# EAGLE board quadcopter (EAGLE 7.5.0)
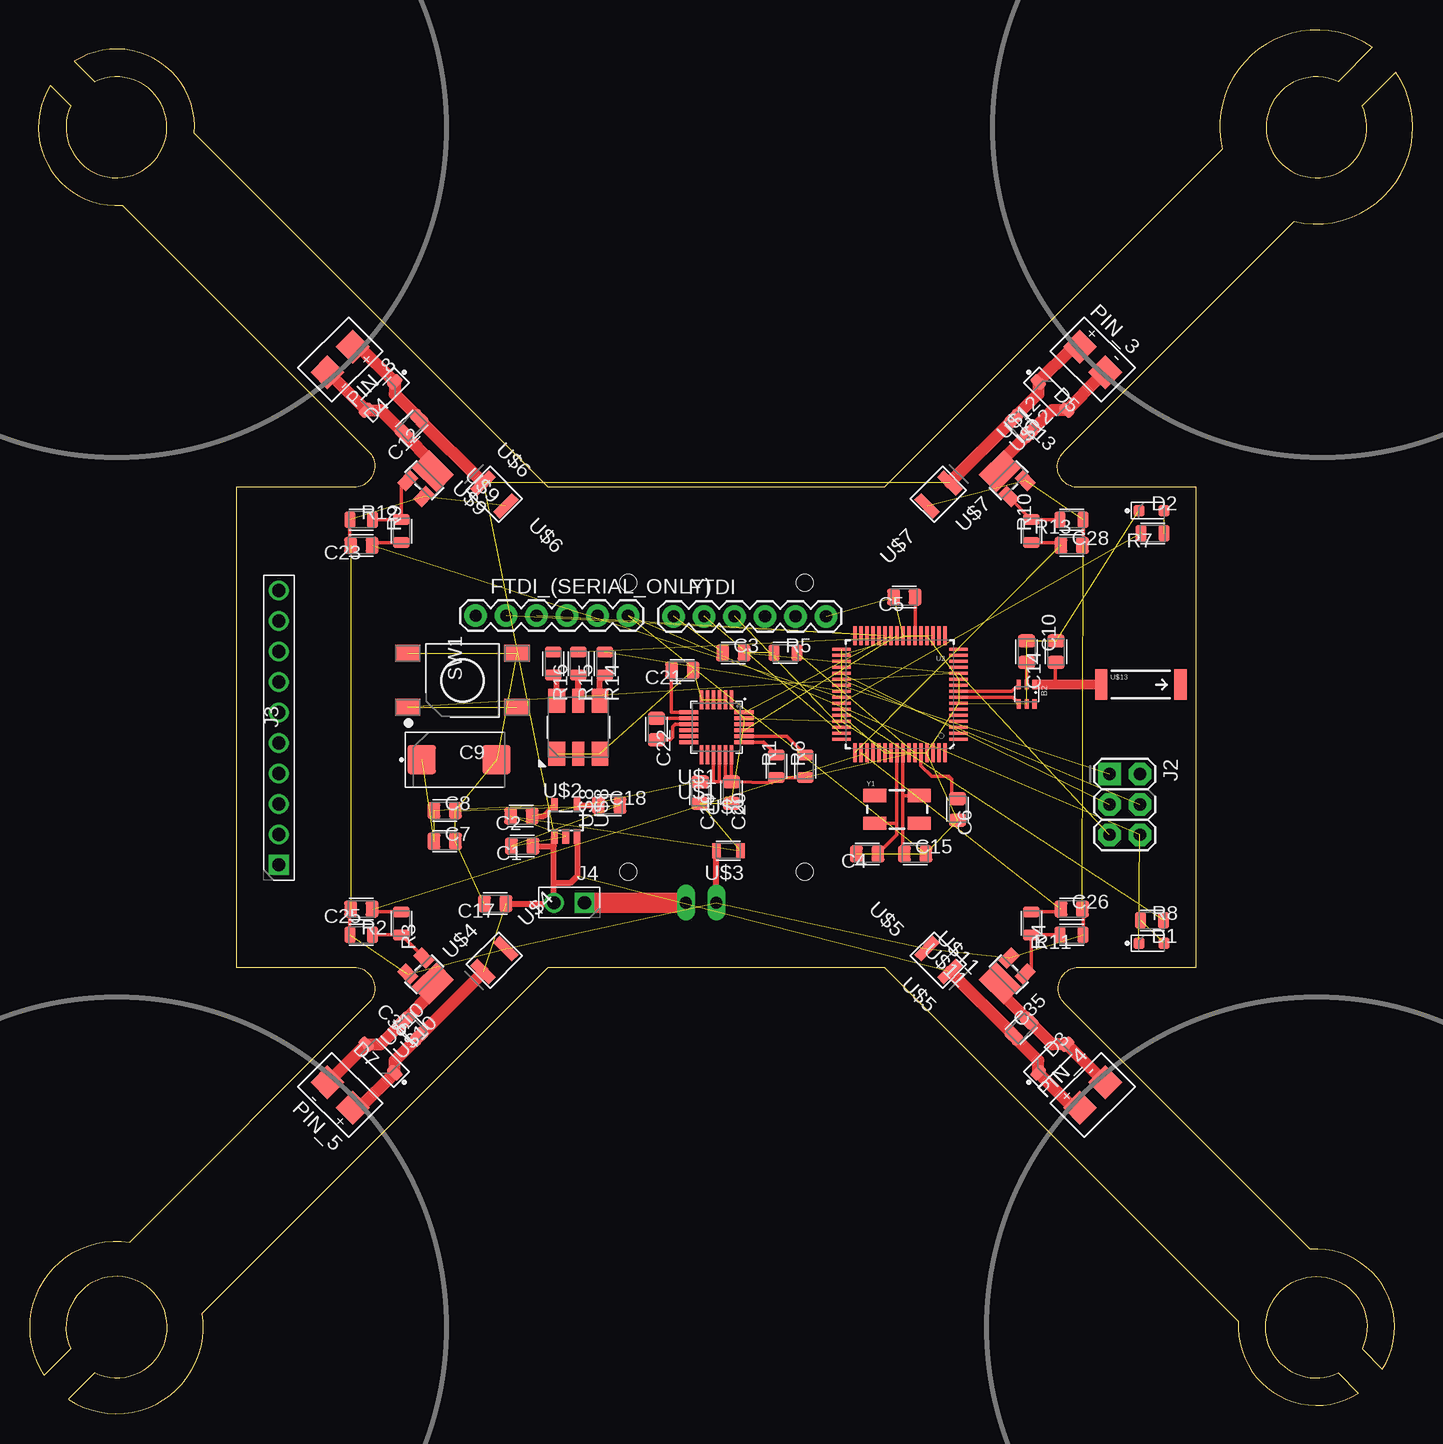
[diagram p0: board, top side]
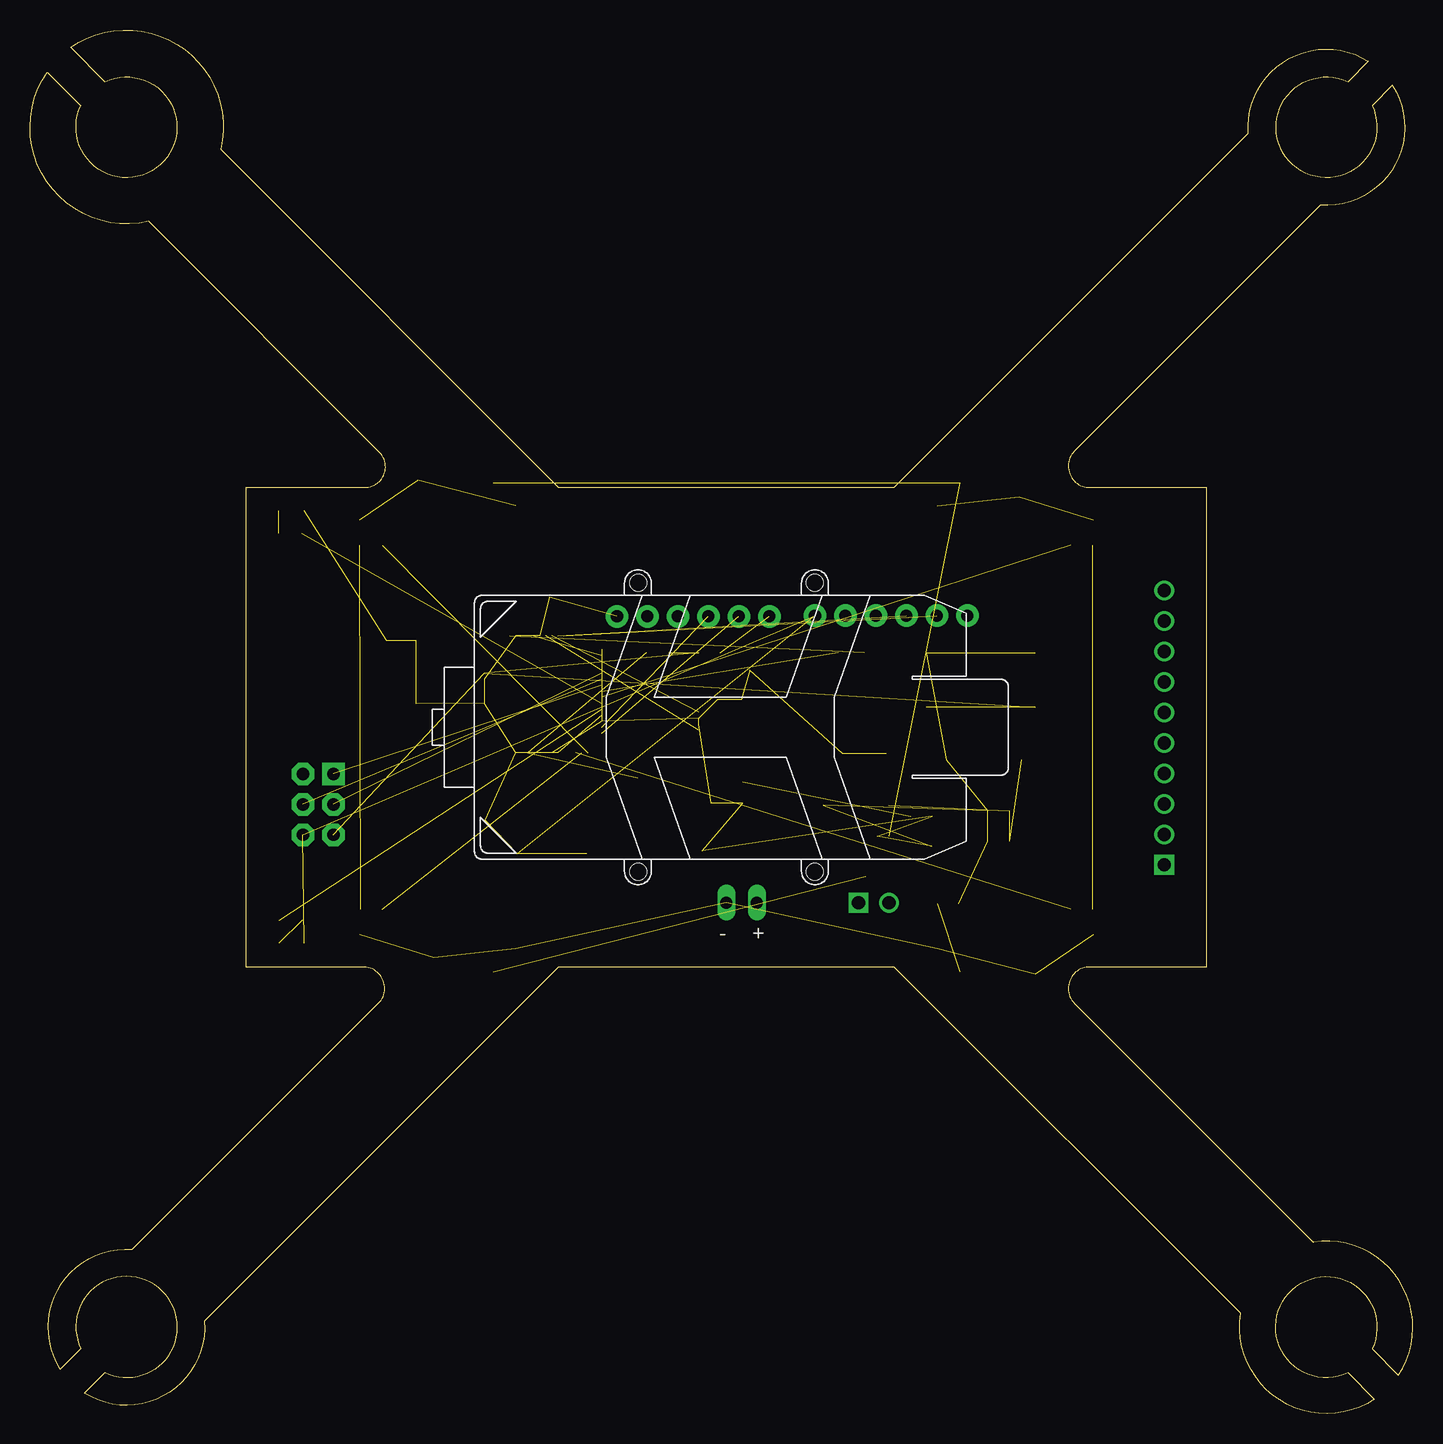
[diagram p1: board, bottom side, seen from below]

Size 115.24 x 115.31 mm. Coordinates in mm from the lower left corner, seen from the top.
Outline: 87.21,77.21 97.21,77.21 97.21,37.21 87.21,37.21 arc127 86.21,34.21 106.71,13.71 arc-127 112.71,3.71 111.01,5.41 arc70 110.21,10.21 arc180 104.21,4.21 arc70 109.01,3.41 110.71,1.71 arc-126 100.71,7.71 71.21,37.21 43.21,37.21 14.36,8.36 arc-132 3.21,1.21 5.41,3.41 arc321 3.41,5.41 1.21,3.21 arc-132 8.31,14.31 28.21,34.21 arc127 27.21,37.21 17.21,37.21 17.21,77.21 27.21,77.21 arc127 28.21,80.21 7.71,100.71 arc-127 1.71,110.71 3.41,109.01 arc321 5.41,111.01 3.71,112.71 arc-127 13.71,106.71 43.21,77.21 71.21,77.21 99.36,105.36 arc-138 111.86,113.86 109.01,111.01 arc321 111.01,109.01 113.81,111.81 arc-138 105.36,99.36 86.21,80.21
Outline: 87.21,77.21 arc-135 86.21,80.21
Outline: 87.21,77.21 arc-135 86.21,80.21
Copper layers (1*2*15*16): Top 0.035559375mm / dielectric 1.501140625mm / Route2 0.035559375mm / dielectric 0.149859375mm / Route15 0.035559375mm / dielectric 0.200659375mm / Bottom 0.035559375mm
Design rules "Xuefei-4pcb-33board": minimum track width 6mil, minimum drill 15mil, track to track 6mil, track to pad 6mil, pad to pad 6mil, via to via 6mil, smd to smd 6mil, copper to edge 10mil, drill to drill 10mil, minimum pad ring 10mil, minimum via ring 8mil, stop-mask expansion 4mil, vias tented up to drill 0mil, thermal gap 10mil
Net classes: 1 HighAmps: width 0.762 mm

## Footprints (pad centres in the part's own frame; a part is rotated, then mirrored left to right if it is on the bottom)
BALUN = smd 0.35 x 0.8: 1 -0.65,-0.8; 2 0,-0.8; 3 0.65,-0.8; 4 0.65,0.8; 5 0,0.8; 6 -0.65,0.8
BATTERY-W/HOLDER-380MAH-HUBSAN = drill 1 long: + -2.54,14.605; - 0,14.605 | hole 1.4: -7.35,-12.05; -7.35,12.05; 7.35,-12.05; 7.35,12.05
CAPC2012X140_HS = smd 1.08 x 1.42: 1 -0.895,0; 2 0.895,0
CAPMP7343X310_HS = smd 2.37 x 2.43: 1 -3.12,0; 2 3.12,0
LEDSC125X200X120-2_HS = smd 0.94 x 0.99: A 1.045,0; C -1.045,0
SOD3716X135_HS = smd 1.25 x 0.8: A 1.665,0; C -1.665,0
FTDI_BASIC = drill 1.016 pad 1.88: CTS 10.16,0; DTR 0,0; GND 12.7,0; RXI 2.54,0; TXO 5.08,0; VCC 7.62,0
2X3-NS = drill 1.016 pad 1.88 square: 1 -2.54,-1.27 | drill 1.016 pad 1.88 octagon: 2 -2.54,1.27; 3 0,-1.27; 4 0,1.27; 5 2.54,-1.27; 6 2.54,1.27
HDRV10W63P254_10X1_2540X254H838_HS = drill 1.1 pad 1.65 square: 1 0,0 | drill 1.1 pad 1.65: 2 2.54,0; 3 5.08,0; 4 7.62,0; 5 10.16,0; 6 12.7,0; 7 15.24,0; 8 17.78,0; 9 20.32,0; 10 22.86,0
MALE_HEADER_2X1_0.1IN = drill 1.1 pad 1.65 square: 1 0,0 | drill 1.1 pad 1.65: 2 2.54,0
MOTOR_PADS = smd 2 x 2: V+ -1,0; V- 2,0
RESC2012X60_HS = smd 0.92 x 1.38: 1 -0.955,0; 2 0.955,0
TE_FSM8JSMA_HS = smd 1.4 x 2.1: 1 -2.25,4.55; 2 -2.25,-4.55; 3 2.25,4.55; 4 2.25,-4.55
QFN-64 = smd 1.562 x 0.28: 1 -4.881,3.75; 2 -4.881,3.25; 3 -4.881,2.75; 4 -4.881,2.25; 5 -4.881,1.75; 6 -4.881,1.25; 7 -4.881,0.75; 8 -4.881,0.25; 9 -4.881,-0.25; 10 -4.881,-0.75; 11 -4.881,-1.25; 12 -4.881,-1.75; 13 -4.881,-2.25; 14 -4.881,-2.75; 15 -4.881,-3.25; 16 -4.881,-3.75; 33 4.881,-3.75; 34 4.881,-3.25; 35 4.881,-2.75; 36 4.881,-2.25; 37 4.881,-1.75; 38 4.881,-1.25; 39 4.881,-0.75; 40 4.881,-0.25; 41 4.881,0.25; 42 4.881,0.75; 43 4.881,1.25; 44 4.881,1.75; 45 4.881,2.25; 46 4.881,2.75; 47 4.881,3.25; 48 4.881,3.75 | smd 0.28 x 1.562: 17 -3.75,-4.881; 18 -3.25,-4.881; 19 -2.75,-4.881; 20 -2.25,-4.881; 21 -1.75,-4.881; 22 -1.25,-4.881; 23 -0.75,-4.881; 24 -0.25,-4.881; 25 0.25,-4.881; 26 0.75,-4.881; 27 1.25,-4.881; 28 1.75,-4.881; 29 2.25,-4.881; 30 2.75,-4.881; 31 3.25,-4.881; 32 3.75,-4.881; 49 3.75,4.881; 50 3.25,4.881; 51 2.75,4.881; 52 2.25,4.881; 53 1.75,4.881; 54 1.25,4.881; 55 0.75,4.881; 56 0.25,4.881; 57 -0.25,4.881; 58 -0.75,4.881; 59 -1.25,4.881; 60 -1.75,4.881; 61 -2.25,4.881; 62 -2.75,4.881; 63 -3.25,4.881; 64 -3.75,4.881
LGA-24_4X4MM = smd 0.3 x 1.6: P$1 1.25,2.3; P$2 0.75,2.3; P$3 0.25,2.3; P$4 -0.25,2.3; P$5 -0.75,2.3; P$6 -1.25,2.3; P$13 -1.25,-2.3; P$14 -0.75,-2.3; P$15 -0.25,-2.3; P$16 0.25,-2.3; P$17 0.75,-2.3; P$18 1.25,-2.3 | smd 1.6 x 0.3: P$7 -2.3,1.25; P$8 -2.3,0.75; P$9 -2.3,0.25; P$10 -2.3,-0.25; P$11 -2.3,-0.75; P$12 -2.3,-1.25; P$19 2.3,-1.25; P$20 2.3,-0.75; P$21 2.3,-0.25; P$22 2.3,0.25; P$23 2.3,0.75; P$24 2.3,1.25
SOT23-DBV = smd 0.55 x 1.2: 1 -0.95,-1.3; 2 0,-1.3; 3 0.95,-1.3; 4 0.95,1.3; 5 -0.95,1.3
SMD_RESISTOR = smd 0.7 x 1.25: P$1 -1,0; P$2 1,0
TAJB_SMB_POLAR_CAP = smd 0.8 x 2.2: P$1 -1.35,0; P$2 1.35,0
QBLP679E-RGB = smd 2 x 1.4: P$1 2.2,-1.8; P$3 2.2,1.8; P$4 -2.2,1.8; P$6 -2.2,-1.8 | smd 2 x 1: P$2 2.2,0; P$5 -2.2,0
LITTLE_FOOT_MOSFET_W/_HEAT_SPREADER = smd 1 x 1.5: P$1 -0.95,-1; P$2 0.95,-1 | smd 2.9 x 2.05: P$3 0,1.025
ANTENNA-CHIP5 = smd 1.016 x 2.54: FEED -3.302,0; NC 3.302,0
CRYSTAL-SMD-5X3 = smd 1.9 x 1.1: 1 -1.85,-1.15; 2 1.85,-1.15; 3 1.85,1.15; 4 -1.85,1.15

## Placement (x,y rotation side)
B2  BALUN0805  [BALUN]  83.06,59.96 180 top
BATT1  BATTERY-HUBSAN-W/HOLDER  [BATTERY-W/HOLDER-380MAH-HUBSAN]  57.21,57.21 180 bottom
C1  10uF  [CAPC2012X140_HS]  41.01,47.31 180 top
C2  10uF  [CAPC2012X140_HS]  40.96,49.81 180 top
C3  0.1uF  [CAPC2012X140_HS]  58.61,63.41 0 top
C4  12pF  [CAPC2012X140_HS]  69.76,46.66 180 top
C5  1uF  [CAPC2012X140_HS]  72.86,68.06 180 top
C6  1uF  [CAPC2012X140_HS]  77.31,50.36 270 top
C7  1uF  [CAPC2012X140_HS]  34.56,47.71 0 top
C8  1uF  [CAPC2012X140_HS]  34.56,50.26 0 top
C9  220uF  [CAPMP7343X310_HS]  35.76,54.51 0 top
C10  0.75pF  [CAPC2012X140_HS]  85.51,63.51 90 top
C12  1uF  [CAPC2012X140_HS]  31.81,82.31 225 top
C13  1uF  [CAPC2012X140_HS]  82.61,82.31 315 top
C14  22pF  [CAPC2012X140_HS]  83.06,63.51 270 top
C15  12pF  [CAPC2012X140_HS]  73.76,46.66 0 top
C17  0.1uF  [CAPC2012X140_HS]  38.76,42.51 180 top
C18  0.01uF  [CAPC2012X140_HS]  48.26,50.71 0 top
C19  0.1uF  [CAPC2012X140_HS]  55.86,51.76 270 top
C20  10uF  [CAPC2012X140_HS]  58.46,51.76 270 top
C21  4.7uF  [CAPC2012X140_HS]  54.36,61.96 180 top
C22  0.22uF  [CAPC2012X140_HS]  52.21,57.06 270 top
C23  1uF  [CAPC2012X140_HS]  27.61,72.36 180 top
C25  1uF  [CAPC2012X140_HS]  27.61,42.06 180 top
C26  1uF  [CAPC2012X140_HS]  86.81,42.06 0 top
C28  1uF  [CAPC2012X140_HS]  86.81,72.36 0 top
C35  1uF  [CAPC2012X140_HS]  82.61,32.11 45 top
C36  1uF  [CAPC2012X140_HS]  31.81,32.11 135 top
D1  green  [LEDSC125X200X120-2_HS]  93.46,39.21 0 top
D2  green  [LEDSC125X200X120-2_HS]  93.46,75.26 0 top
D3  360mV  [SOD3716X135_HS]  85.21,29.61 45 top
D4  360mV  [SOD3716X135_HS]  29.21,84.81 225 top
D5  360mV  [SOD3716X135_HS]  85.21,84.81 315 top
D7  360mV  [SOD3716X135_HS]  29.21,29.61 135 top
FTDI  FTDI_BASICPTH  [FTDI_BASIC]  53.64,66.45 0 top
FTDI_(SERIAL_ONLY)  FTDI_BASICPTH  [FTDI_BASIC]  37.14,66.51 0 top
J2  AVR_SPI_PRG_6NS  [2X3-NS]  91.23,50.78 270 top
J3  [HDRV10W63P254_10X1_2540X254H838_HS]  20.74,45.74 90 top
J4  [MALE_HEADER_2X1_0.1IN]  46.21,42.59 180 top
PIN_3  MOTOR_PADS  [MOTOR_PADS]  88.21,88.21 315 top
PIN_4  MOTOR_PADS  [MOTOR_PADS]  88.21,26.21 45 top
PIN_5  MOTOR_PADS  [MOTOR_PADS]  26.21,26.21 135 top
PIN_8  MOTOR_PADS  [MOTOR_PADS]  26.21,88.21 225 top
R1  10K  [RESC2012X60_HS]  62.21,53.96 90 top
R2  10K  [RESC2012X60_HS]  27.61,39.91 0 top
R3  100  [RESC2012X60_HS]  30.96,40.86 270 top
R4  100  [RESC2012X60_HS]  83.46,40.86 270 top
R5  10K  [RESC2012X60_HS]  62.96,63.41 0 top
R6  10K  [RESC2012X60_HS]  64.61,53.96 90 top
R7  330  [RESC2012X60_HS]  93.56,73.36 180 top
R8  330  [RESC2012X60_HS]  93.51,41.11 0 top
R9  100  [RESC2012X60_HS]  30.96,73.56 90 top
R10  100  [RESC2012X60_HS]  83.46,73.56 90 top
R11  10K  [RESC2012X60_HS]  86.81,39.91 180 top
R12  10K  [RESC2012X60_HS]  27.61,74.51 0 top
R13  10K  [RESC2012X60_HS]  86.81,74.51 180 top
R14  330  [RESC2012X60_HS]  47.91,62.51 270 top
R15  330  [RESC2012X60_HS]  45.71,62.51 270 top
R16  330  [RESC2012X60_HS]  43.61,62.51 270 top
SW1  PUSHBUTTON_SMD-VERTICAL-1  [TE_FSM8JSMA_HS]  36.03,61.12 90 top
U2  ATMEGA128RFA1  [QFN-64]  72.5,59.96 180 top
U$1  IMU  [LGA-24_4X4MM]  57.21,57.21 0 top
U$2  TPS73633-DBVT  [SOT23-DBV]  44.65,49.41 0 top
U$3  0  [SMD_RESISTOR]  58.21,46.91 0 top
U$4  100uF  [TAJB_SMB_POLAR_CAP]  38.71,37.81 45 top
U$5  100uF  [TAJB_SMB_POLAR_CAP]  75.71,37.81 135 top
U$6  100uF  [TAJB_SMB_POLAR_CAP]  38.71,76.61 315 top
U$7  100uF  [TAJB_SMB_POLAR_CAP]  75.71,76.61 225 top
U$8  QBLP679E-RGB  [QBLP679E-RGB]  45.7,57.21 270 top
U$9  N-CHANNEL_MOSFETW/_HEAT_SINK  [LITTLE_FOOT_MOSFET_W/_HEAT_SPREADER]  32.86,77.81 315 top
U$10  N-CHANNEL_MOSFETW/_HEAT_SINK  [LITTLE_FOOT_MOSFET_W/_HEAT_SPREADER]  32.86,36.61 225 top
U$11  N-CHANNEL_MOSFETW/_HEAT_SINK  [LITTLE_FOOT_MOSFET_W/_HEAT_SPREADER]  81.56,36.61 135 top
U$12  N-CHANNEL_MOSFETW/_HEAT_SINK  [LITTLE_FOOT_MOSFET_W/_HEAT_SPREADER]  81.56,77.81 45 top
U$13  ANTENNA2SMD5  [ANTENNA-CHIP5]  92.58,60.77 0 top
Y1  [CRYSTAL-SMD-5X3]  72.26,50.37 0 top

## Library data of the parts
B2 = quadparts_prebuilt; DATASHEET: http://katalog.we-online.de/pbs/datasheet/748421245.pdf; DIST: Digikey; DISTPN: 732-2230-6-ND; MFR: Wurth Electronics Inc; MPN: 748421245; PRICE: 2.63
BATT1 PIN_3-PIN_5 PIN_8 = quadparts_prebuilt
C1 C2 C20 = quadparts_prebuilt; DIST: Digikey; DISTPN: 490-5523-1-ND; MFR: Murata Electronics North America; MPN: GRM21BR61E106KA73L
C3 C17 C19 = quadparts_prebuilt; DIST: Digikey; DISTPN: 490-1666-1-ND; MFR: Murata Electronics North America; MPN: GRM21BR71H104KA01L
C4 C15 = quadparts_prebuilt; DIST: Digikey; DISTPN: 490-5531-1-ND; MFR: Murata Electronics North America; MPN: GRM21A5C2E120JW01D
C5-C8 C12 C13 C23 C25 C26 C28 C35 C36 = quadparts_prebuilt; DIST: Digikey; DISTPN: 490-4736-1-ND; MFR: Murata Electronics North America; MPN: GRM21BR71H105KA12L
C9 = quadparts_prebuilt; DIST: Digikey; DISTPN: 478-8912-1-ND; MFR: AVX Corporation; MPN: TAJD227K006RNJ
C10 = quadparts_prebuilt; DIST: Digikey; DISTPN: 490-3585-1-ND; MFR: Murata Electronics North America; MPN: GQM2195C2AR75CB01D
C14 = quadparts_prebuilt; DIST: Digikey; DISTPN: 490-5534-1-ND; MFR: Murata Electronics North America; MPN: GRM21A5C2E220JW01D
C18 = quadparts_prebuilt; DIST: Digikey; DISTPN: 490-8295-1-ND; MFR: Murata Electronics North America; MPN: GRM2195C1H103FA01D
C21 = quadparts_prebuilt; DIST: Digikey; DISTPN: 490-3335-1-ND; MFR: Murata Electronics North America; MPN: GRM21BR61E475KA12L
C22 = quadparts_prebuilt; DIST: Digikey; DISTPN: 490-1670-1-ND; MFR: Murata Electronics North America; MPN: GRM21BR71H224KA01L
D1 D2 = quadparts_prebuilt; DIST: Digikey; DISTPN: 160-1179-1-ND; MFR: Lite-On Inc; MPN: LTST-C170GKT
D3-D5 D7 = quadparts_prebuilt; DIST: Digikey; DISTPN: CRS08QMCT-ND; MFR: Toshiba Semiconductor and Storage; MPN: CRS08(TE85L,Q,M)
FTDI FTDI_(SERIAL_ONLY) = quadparts_prebuilt; DATASHEET: http://portal.fciconnect.com/Comergent//fci/drawing/68015.pdf; DIST: Digikey; DISTPN: 609-3327-ND; MFR: Amphenol FCI; MPN: 68016-406HLF; PRICE: 0.33
J2 = quadparts_prebuilt; DATASHEET: http://portal.fciconnect.com/Comergent//fci/drawing/67996.pdf; DIST: Digikey; DISTPN: 609-3234-ND; MFR: Amphenol FCI; MPN: 67997-206HLF; PRICE: 0.31
J3 = quadparts_prebuilt; DIST: Digikey; DISTPN: 609-3250-ND; MFR: Amphenol FCI; MPN: 68000-110HLF
J4 = quadparts; CREATOR: SWANSON; DIST: Digikey; DISTPN: 3M9447-ND; MFR: 3M; MPN: 961102-6404-AR
R1 R2 R5 R6 R11-R13 = quadparts_prebuilt; DIST: Digikey; DISTPN: 311-10KARCT-ND; MFR: Yageo; MPN: RC0805JR-0710KL
R3 R4 R9 R10 = quadparts_prebuilt; DIST: Digikey; DISTPN: 311-100ARCT-ND; MFR: Yageo; MPN: RC0805JR-07100RL
R7 R8 R14-R16 = quadparts_prebuilt; DIST: Digikey; DISTPN: 311-330ARCT-ND; MFR: Yageo; MPN: RC0805JR-07330RL
SW1 = quadparts_prebuilt; DIST: Digikey; DISTPN: 450-1129-ND; MFR: TE Connectivity Alcoswitch Switches; MPN: FSM4JSMA
U2 = quadparts_prebuilt; DATASHEET: http://www.atmel.com/Images/Atmel-8266-MCU_Wireless-ATmega128RFA1_Datasheet.pdf; DIST: Digikey; DISTPN: ATMEGA128RFA1-ZUR00DKR-ND; MFR: Atmel; MPN: ATMEGA128RFA1-ZUR00; PRICE: 10.21
U$1 = quadparts; CREATOR: Xuefei; DIST: DIGIKEY; DISTPN: 497-13902-1-ND; MFP: LSM9DS0TR; MFR: STMicroelectronics
U$2 = quadparts_prebuilt; DATASHEET: http://www.ti.com/lit/ds/symlink/lp3985.pdf; DIST: Digikey; DISTPN: LP3985IM5X-3.0/NOPBCT-ND; MFR: Texas Instruments; MPN: LP3985IM5X-3.0/NOPB; PRICE: 0.59
U$3 = quadparts; CREATOR: Xuefei; DIST: DIGIKEY; DISTPN: 311-0.0ARCT-ND; MFR: Yageo; MPN: RC0805JR-070RL
U$4-U$7 = quadparts; CREATOR: Xuefei; DIST: DIGIKEY; DISTPN: 478-1677-1-ND; MFR: AVX Corporation; MPN: TAJB107K006RNJ
U$8 = quadparts; CREATOR: Xuefei; DIST: DIGIKEY; DISTPN: 1516-1131-1-ND; MFR: QT Brightek (QTB); MPN: QBLP679E-RGB
U$9-U$12 = quadparts
U$13 = quadparts_prebuilt; DATASHEET: http://www.linxtechnologies.com/resources/data-guides/ant-xxx-chp-x.pdf; DIST: Digikey; DISTPN: ANT-2.45-CHPCT-ND; MFR: Linx Technologies Inc.; MPN: ANT-2.45-CHP-T; PRICE: 3.16
Y1 = quadparts_prebuilt; DATASHEET: http://www.abracon.com/Resonators/abm3b.pdf; DIST: Digikey; DISTPN: 535-9122-1-ND; MFR: Abracon LLC; MPN: ABM3B-16.000MHZ-B2-T; PRICE: 0.68; PROD_ID: XTAL-08218

## Nets
3.3V: C2.1 C7.1 C8.1 C9.1 C19.1 C20.1 R1.1 R5.2 R6.1 U2.23 U2.34 U2.44 U2.54 U2.59 U$1.P$15 U$1.P$16 U$1.P$17 U$1.P$18 U$2.5
A0: U2.63
A1: U2.64
A2: U2.1
A3: U2.2
A4: U2.3
A5: U2.4
A6: U2.5
A7: U2.6
AREF: U2.62
AVDD: C6.1 U2.60
BAT_GND: BATT1.- C23.2 C25.2 C26.2 C28.2 R2.1 R11.1 R12.1 R13.1 U$3.P$1 U$4.P$2 U$5.P$2 U$6.P$2 U$7.P$2 U$9.P$2 U$10.P$2 U$11.P$2 U$12.P$2
DTR: C3.1 FTDI.DTR
DVDD: C5.1 U2.21 U2.22
GND: B2.5 C1.2 C2.2 C4.2 C5.2 C6.2 C7.2 C8.2 C9.2 C10.2 C14.1 C15.2 C17.2 C18.2 C19.2 C20.2 C21.1 D1.C D2.C FTDI.GND FTDI_(SERIAL_ONLY).GND J2.6 SW1.3 SW1.4 U2.7 U2.10 U2.11 U2.20 U2.24 U2.33 U2.35 U2.45 U2.55 U2.58 U2.61 U$1.P$2 U$1.P$3 U$1.P$4 U$1.P$5 U$1.P$6 U$1.P$22 U$1.P$23 U$2.2 U$3.P$2 U$8.P$1 U$8.P$2 U$8.P$3
MISO: J2.1 U2.39
MOSI: J2.4 U2.38
N$1: R14.2 U$8.P$4
N$2: R15.2 U$8.P$5
N$3: C15.1 U2.57 Y1.3
N$4: C4.1 U2.56 Y1.1
N$5: C18.1 U$2.4
N$6: C21.2 U$1.P$7
N$7: B2.2 C14.2
N$8: D2.A R7.1
N$9: R16.2 U$8.P$6
N$12: C22.1 U$1.P$8
N$13: D1.A R8.1
N$14: C22.2 U$1.P$9
N$15: R1.2 U$1.P$19
N$16: R6.2 U$1.P$20
N$17: BATT1.+ J4.1
N$18: R9.2 R12.2 U$9.P$1
N$19 [HighAmps]: C12.2 D4.A PIN_8.V- U$9.P$3
N$21: R2.2 R3.2 U$10.P$1
N$22 [HighAmps]: C36.2 D7.A PIN_5.V- U$10.P$3
N$24: R10.2 R13.2 U$12.P$1
N$25 [HighAmps]: C13.2 D5.A PIN_3.V- U$12.P$3
N$27: R4.2 R11.2 U$11.P$1
N$28 [HighAmps]: C35.2 D3.A PIN_4.V- U$11.P$3
PB4: R14.1 U2.40
PB5: C23.1 R9.1 U2.41
PB6: R7.2 U2.42
PB7: R8.2 U2.43
PD4: U2.29
PD5: U2.30
PD6: U2.31
PD7: U2.32
PE2: U2.48
PE3: C28.1 R10.1 U2.49
PE4: C26.1 R4.1 U2.50
PE5: C25.1 R3.1 U2.51
PE6: U2.52
PE7: U2.53
PG0: U2.14
PG1: U2.15
PG2: U2.16
PG5: R15.1 U2.19
RESET: C3.2 J2.5 R5.1 SW1.1 SW1.2 U2.12
RFANT: B2.1 C10.1 U$13.FEED
RFN: B2.3 U2.9
RFP: B2.4 U2.8
RSTON: U2.13
RX0: FTDI.TXO U2.46
RX1: FTDI_(SERIAL_ONLY).TXO U2.27
SCK: J2.3 U2.37
SCL: U2.25 U$1.P$21
SDA: U2.26 U$1.P$24
SSN: U2.36
TX0: FTDI.RXI U2.47
TX1: FTDI_(SERIAL_ONLY).RXI U2.28
VCC: C1.1 C12.1 C13.1 C17.1 C35.1 C36.1 D3.C D4.C D5.C D7.C J4.2 PIN_3.V+ PIN_4.V+ PIN_5.V+ PIN_8.V+ U$2.1 U$2.3 U$4.P$1 U$5.P$1 U$6.P$1 U$7.P$1

## Tracks (layer width: path | path; a pad name or v marks a point on that pad's centre or on a via)
3.3V  (10 unrouted)
  Top 0.3: R1.1 R6.1 | U$1.P$18 C20.1 | 61.96,52.75 R1.1 | 62.11,52.9 R1.1 | C19.1 56.96,52.65 | 56.96,52.65 57.41,52.65 | 57.41,52.65 57.91,52.65 | 57.91,52.65 C20.1 | C20.1 61.81,52.6 R1.1 | U$1.P$17 57.96,52.7 57.91,52.65 | U$1.P$16 57.46,52.7 57.41,52.65 | U$1.P$15 56.96,52.65
  Top 0.5: C2.1 42.8,49.81 U$2.5
AVDD
  Top 0.3: U2.60 74.25,54.02 75.16,53.11 76.56,53.11 76.81,52.86 76.81,51.75 C6.1
BAT_GND  (12 unrouted)
  Top 0.3: R13.1 87.76,72.37 C28.2 | R12.1 26.65,72.42 C23.2 | R2.1 26.65,42 C25.2 | R11.1 87.76,42 C26.2
  Top 0.5: BATT1.- U$3.P$1
DTR  (1 unrouted)
DVDD  (1 unrouted)
  Top 0.3: C5.1 73.75,65.34 U2.22
GND  (46 unrouted)
MISO  (1 unrouted)
MOSI  (1 unrouted)
N$1
  Top 0.5: U$8.P$4 47.5,61.14 R14.2
N$2
  Top 0.5: U$8.P$5 R15.2
N$3
  Top 0.3: U2.57 72.75,51.51 | 72.75,51.51 72.75,47.04 C15.1 | Y1.3 72.76,51.52 72.75,51.51
N$4
  Top 0.3: U2.56 72.25,49.36 | 72.25,49.36 72.25,48.25 C4.1 | Y1.1 72.11,49.22 72.25,49.36
N$5
  Top 0.5: U$2.4 C18.1
N$6
  Top 0.3: U$1.P$7 53.46,58.46 53.46,61.56 C21.2
N$7
  Top 0.3: C14.2 B2.2
N$8  (1 unrouted)
N$9
  Top 0.5: U$8.P$6 43.9,61.26 R16.2
N$12
  Top 0.3: C22.1 U$1.P$8
N$13  (1 unrouted)
N$14
  Top 0.3: C22.2 53.36,56.16 53.56,56.36 53.56,57.26 53.76,57.46 U$1.P$9
N$15
  Top 0.3: U$1.P$19 61.16,55.96 R1.2
N$16
  Top 0.3: U$1.P$20 63.06,56.46 R6.2
N$17
  Top 0.3: J4.1 54.65,42.59 BATT1.+
N$18
  Top 0.3: U$9.P$1 30.96,77.25 R9.2 R12.2
N$19
  Top 1: PIN_8.V- 24.87,86.79 D4.A 29.22,83.63 C12.2 33.58,79.26 U$9.P$3
N$21
  Top 0.3: U$10.P$1 32.82,38.04 R3.2 R2.2
N$22
  Top 1: PIN_5.V- 24.87,27.62 D7.A 29.22,30.78 C36.2 33.58,35.15 U$10.P$3
N$24
  Top 0.3: U$12.P$1 81.59,76.38 R10.2 R13.2
N$25
  Top 1: PIN_3.V- 89.07,86.32 D5.A 85.19,83.63 C13.2 80.78,79.21 U$12.P$3
N$27
  Top 0.3: U$11.P$1 83.46,37.16 R4.2 R11.2
N$28
  Top 1: PIN_4.V- 89.55,27.62 D3.A 85.19,30.78 C35.2 80.83,35.15 U$11.P$3
PB4  (1 unrouted)
PB5  (1 unrouted)
  Top 0.3: R9.1 28.75,72.6 C23.1
PB6  (1 unrouted)
PB7  (1 unrouted)
PE3  (1 unrouted)
  Top 0.3: R10.1 85.72,72.6 C28.1
PE4  (1 unrouted)
  Top 0.3: R4.1 85.67,41.81 C26.1
PE5  (1 unrouted)
  Top 0.3: R3.1 28.75,41.81 C25.1
PG5  (1 unrouted)
RESET  (5 unrouted)
RFANT
  Top 0.3: B2.1 85.46,60.76 | 85.46,60.76 U$13.FEED | C10.1 85.46,62.56 85.46,60.76
RFN
  Top 0.3: U2.9 81.81,60.21 B2.3
RFP
  Top 0.3: U2.8 81.91,59.71 B2.4
RX0  (1 unrouted)
RX1  (1 unrouted)
SCK  (1 unrouted)
SCL  (1 unrouted)
SDA  (1 unrouted)
TX0  (1 unrouted)
TX1  (1 unrouted)
VCC  (4 unrouted)
  Top 0.5: 43.67,44.21 J4.2 43.59,42.51 C17.1 | 43.67,44.21 43.67,47.31 | 43.67,47.31 43.67,48.08 U$2.1 | U$2.3 45.6,44.8 45.01,44.21 43.67,44.21 | C1.1 43.67,47.31
  Top 1: PIN_3.V+ 86.76,88.71 D5.C 84.03,84.99 C13.1 81.97,82.87 U$7.P$1 | U$4.P$1 37.75,36.79 C36.1 30.38,29.42 D7.C 27.45,25.5 PIN_5.V+ | PIN_4.V+ 86.96,25.5 D3.C 84.03,29.42 C35.1 81.97,31.54 U$5.P$1 | PIN_8.V+ 27.45,88.91 D4.C 30.38,84.99 C12.1 32.44,82.87 U$6.P$1
(copper drawn outside any net)
  shapes: Top area x2